# Altium PCB Digital Sensor Module.PcbDoc
Units mil, origin at the board's own origin, x right, y up, seen from the top; angles counter-clockwise.
Board outline 3750 x 900 mil, 2 copper layers (Top Layer, Bottom Layer); 42 components, 43 nets, 164 pads, 222 vias.
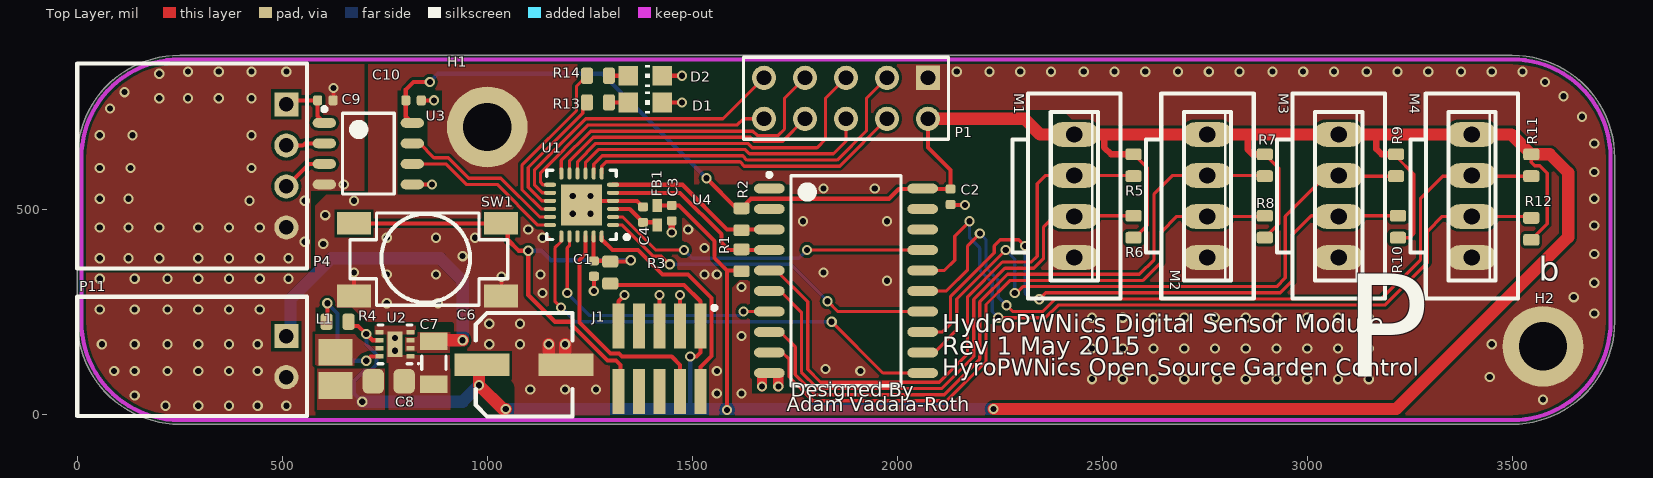
[diagram p0: Top Layer view]
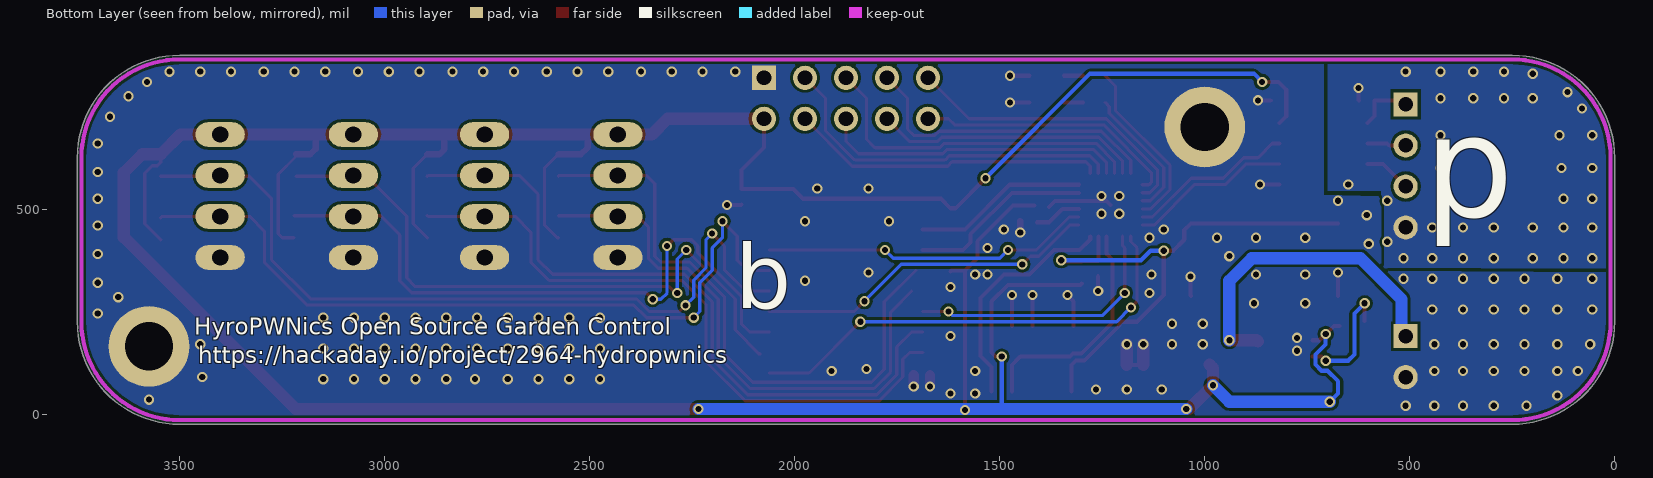
[diagram p1: Bottom Layer view, seen from below]

## Layer stack, top to bottom
Top Solder: solder mask 0.4, Solder Resist, Dk 3.5
Top Layer: signal copper 1.4
Dielectric 1: dielectric 12.6, FR-4, Dk 4.8
Bottom Layer: signal copper 1.4
Bottom Solder: solder mask 0.4, Solder Resist, Dk 3.5

## Board outline
0,225 0,625 cw(c250,625) 250,875 3500,875 cw(c3500,625) 3750,625 3750,225 cw(c3500,225) 3500,-25 250,-25 cw(c250,225)

## Design rules (kind name [scope] priority, off if disabled: settings)
AcuteAngle [All] p1: minimum=6.00000000000000E+0001 checktracksonly=FALSE
Clearance [All] p1: gap=7
ComponentClearance [All] p1: gap=0 collisioncheckmode=3 verticalgap=10 showdistances=FALSE
FanoutControl Fanout_SOIC [(InComponent('U8') AND InComponent('U7'))] p3: bgadir=Out bgaviamode=Centered fanoutstyle=Staggered fanoutdirection=Alternating viagrid=1 // Fanout_SOIC (Default Rule)
FanoutControl Fanout_Small [All] p4: bgadir=Out bgaviamode=Centered fanoutstyle=Auto fanoutdirection=Alternating viagrid=1 // Fanout_Small (Default Rule)
HoleSize [All] p1: absolutevalues=TRUE maxlimit=200 minlimit=15 maxpercent=80.000 minpercent=20.000
MinimumSolderMaskSliver [All] p1 off: minsoldermaskwidth=10
PasteMaskExpansion [All] p1: expansion=-1
PolygonConnect [All] p1: connectstyle=Direct reliefconductorwidth=10 reliefentries=4 polygonreliefangle="90 Angle" airgapwidth=10
RoutingVias [All] p1: holewidth=15 width=25 viastyle="Through Hole" minholewidth=15 minwidth=25 maxholewidth=28 maxwidth=50
SMDToCorner [All] p1: distance=30000
SilkToSilkClearance [All] p1 off: silktosilkclearance=10
SilkToSolderMaskClearance SilkscreenOverComponentPads [IsPad] p1 off: minsilkscreentomaskgap=10 clearancetoexposedcopper=TRUE
SolderMaskExpansion [All] p1: expansion=4
Width [All] p1: maxlimit=200 minlimit=7 preferedwidth=8 minimp=50.000000 maximp=50.000000 favimp=50.000000
22 further rules are at their usual default settings.

## Components (designator, comment, footprint, x,y, rotation, side; value= is the part's Value field where it differs from the comment)
C1 "100nF" C0402 1260,355 r270 top
C2 "100nF" C0402 2130,530 r270 top
C3 "100nF" C0402 1450,490 r270 top
C4 "100nF" C0402 1380,486.38 r90 top
C6 "EEE-1VA101XP" EEE-1VA101XP 1090,120 r180 top
C7 "10uF 50V" C1206 870,125 r270 top
C8 "0603" C0805 760,80 r180 top
C9 "100nF" C0402 605,765 r0 top
C10 "100nF" C0402 820,765 r0 top
D1 "5988140107F" LED2012120 1385,760 r0 top
D2 "5988140107F" LED2012120 1385,825 r0 top
FB1 "BLM15HG601SN1D" BLM18PG121SN1D 1415,485 r270 top
H1 "M3 Hole" Hole-3mm#1 1025,720 r0 top
H2 "M3 Hole" Hole-3mm#2 3570,145 r0 top
J1 "FTSH-105-XX-X-DV" FTSH-105-XX-X-DV 1420,135 r0 top
L1 "VLS252012T-2R2M1R3" VLS252012T-2R2M1R3 630,110 r270 top
M1 "Molex 0705430003" 4POL254 2431.45,531.77 r270 top
M2 "Molex 0705430003" 4POL254 2756.45,531.77 r270 top
M3 "Molex 0705430003" 4POL254 3076.45,531.77 r270 top
M4 "Molex 0705430003" 4POL254 3401.45,531.77 r270 top
P1 "Header 5X2" HDR2X5 2075,820 r180 top
P4 "Molex 0705530003" 0705530003 510,755 r270 top
P11 "Molex 0705530001" 0705530001 510,190 r270 top
R1 "4.7K" R0603 1620,375 r90 top
R2 "4.7K" R0603 1620,475 r270 top
R3 "1K" R0603 1300,345 r270 top
R4 "100K" R0603 635,225 r0 top
R5 "4.7K" R0603 2576.45,606.77 r270 top
R6 "4.7K" R0603 2576.45,456.77 r90 top
R7 "4.7K" R0603 2896.45,606.77 r270 top
R8 "4.7K" R0603 2896.45,456.77 r90 top
R9 "4.7K" R0603 3216.45,606.77 r270 top
R10 "4.7K" R0603 3221.45,456.77 r90 top
R11 "4.7K" R0603 3546.45,606.77 r270 top
R12 "4.7K" R0603 3546.45,451.77 r90 top
R13 "1K" R0603 1270,760 r0 top
R14 "1K" R0603 1270,825 r0 top
SW1 "TL3301AF160QG" TL3301AF160QG 675,465 r0 top
U1 "MKL05Z16VFK4 - VQFN24" 98ASA00474D 1230,510 r180 top
U2 "TPS62162DSG" DSG8-1600X900TP 775,170 r180 top
U3 "ADUM3210BRZ-RL7" ADUM3210BRZ-RL7 710,635 r0 top
U4 "PCA9518APW" PCA9518APW,512 1875,325 r0 top

## Footprints (in the part's own frame and the unit in brackets; to place one, negate y for a bottom-side part, rotate by r counter-clockwise, add the part's x,y. Pads: shape width x height; smd on the part's side, far side on the other; paste and mask are expansions set on the pad)
4POL254 [mil]
  oval 60x120 hole 40: 1(-150,0) 2(-50,0) 3(50,0) 4(150,0)
  silkscreen extent -250,-150 250,113, body extent -250,-150 250,113, height 454
98ASA00474D [mm] "QFN, 24-Leads, Body 3.98x3.98mm, Pitch 0.50mm, Thermal Pad 2.80x2.80mm, IPC Medium Density"
  oval 0.75x0.25 smd: 1(-1.95,1.25) 2(-1.95,0.75) 3(-1.95,0.25) 4(-1.95,-0.25) 5(-1.95,-0.75) 6(-1.95,-1.25) 13(1.95,-1.25) 14(1.95,-0.75) 15(1.95,-0.25) 16(1.95,0.25) 17(1.95,0.75) 18(1.95,1.25)
  oval 0.25x0.75 smd: 7(-1.25,-1.95) 8(-0.75,-1.95) 9(-0.25,-1.95) 10(0.25,-1.95) 11(0.75,-1.95) 12(1.25,-1.95) 19(1.25,1.95) 20(0.75,1.95) 21(0.25,1.95) 22(-0.25,1.95) 23(-0.75,1.95) 24(-1.25,1.95)
  rect 2.54x2.54 smd: 25(0,0)
  silkscreen extent -2.93,-2.15 2.15,2.15, body extent -2,-2 2,2, height 1
0705530001 [mm]
  rect 1.5x1.5 hole 0.9: 1(0,0)
  round 1.5 hole 0.9: 2(2.54,0)
  silkscreen extent -2.44,-12.95 4.95,1.27, body extent -2.41,-12.88 4.95,0.71, height 6.96
0705530003 [mm] "Molex 2.54mm 0705530003"
  rect 1.5x1.5 hole 0.9: 1(0,0)
  round 1.5 hole 0.9: 2(2.54,0) 3(5.08,0) 4(7.62,0)
  silkscreen extent -2.54,-12.95 10.16,1.27, body extent -2.54,-13.08 10.16,0.51, height 3.02
ADUM3210BRZ-RL7 [mm] "SOIC, 8-Leads, Body 4.90x3.90mm, Pitch 1.27mm, IPC Medium Density"
  oval 1.45x0.6 smd: 1(-2.725,1.905) 2(-2.725,0.635) 3(-2.725,-0.635) 4(-2.725,-1.905) 5(2.725,-1.905) 6(2.725,-0.635) 7(2.725,0.635) 8(2.725,1.905)
  silkscreen extent -2.85,-2.5 1.6,2.88, body extent -2,-2.5 2,2.5, height 1.75
BLM18PG121SN1D [mm] "Chip Inductor, 2-Leads, Body 1.0x0.5mm, IPC Medium Density"
  rect 0.8x0.6 smd: 1(-0.6,0) 2(0.6,0)
  body extent -0.52,-0.28 0.53,0.27, height 0.6
C0402 [mil]
  rrect40% 22x24 smd: 1(-18.7,0) 2(19,0)
  body extent -20,-10 20,10, height 20
C0805 [mil]
  rrect50% 52x60 smd: 1(-37.4,0) 2(38,0)
  body extent -40,-30 40,30, height 35
C1206 [mm]
  rect 1.1x1.7 smd: 1(-1.325,0) 2(1.325,0)
  silkscreen extent -0.4,-0.75 0.4,0.75, body extent -1.68,-0.87 1.67,0.88, height 1.6
DSG8-1600X900TP [mm] "SON, 8-Leads, Body 2x2mm, Pitch 0.5mm, Thermal Pad 1.6x0.9mm, TI Recommended"
  rect 0.5x0.28 smd paste-0.14 mask+0.07: 1(-0.95,0.75) 2(-0.95,0.25) 3(-0.95,-0.25) 4(-0.95,-0.75) 5(0.95,-0.75) 6(0.95,-0.25) 7(0.95,0.25) 8(0.95,0.75)
  rect 0.9x1.6 smd paste-0.45 mask+0.07: 9(0,0)
  silkscreen extent -1.5,-1.2 1.05,1.25, body extent -1.05,-1.05 1.05,1.05, height 0.8
EEE-1VA101XP [mm] "Panasonic VS D EEE-1VA101XP"
  rect 3.4x1.4 smd: 1(2.6,0) 2(-2.6,0)
  silkscreen extent -3,-3.2 3,3.2, body extent -3.5,-3.3 3.5,3.3, height 5.4
FTSH-105-XX-X-DV [mm] "1.27mm pitch, 10 pin, terminal strip; vertical, SMT"
  rect 0.75x2.8 smd mask+0: 1(2.54,2.03) 2(2.54,-2.03) 3(1.27,2.03) 4(1.27,-2.03) 5(0,2.03) 6(0,-2.03) 7(-1.27,2.03) 8(-1.27,-2.03) 9(-2.54,2.03) 10(-2.54,-2.03)
  silkscreen extent 3.28,3.03 3.52,3.27
HDR2X5 [mm] "Connector; Header; 5x2 Position"
  rect 1.5x1.5 hole 0.9: 1(0,0)
  round 1.5 hole 0.9: 2(0,2.54) 3(2.54,0) 4(2.54,2.54) 5(5.08,0) 6(5.08,2.54) 7(7.62,0) 8(7.62,2.54) 9(10.16,0) 10(10.16,2.54)
  silkscreen extent -1.27,-1.27 11.43,3.81
Hole-3mm#1 [mm]
  round 5 hole 3: 1(-0.635,-0.508)
Hole-3mm#2 [mm]
  round 5 hole 3: 1(0.127,0.508)
LED2012120 [mil]
  rect 48x48 smd: A(-41.34,0) C(42,0)
  silkscreen extent 0,-27 12,27, body extent -50,-25 50,25, height 28
PCA9518APW,512 [mm] "SOIC, 20-Leads, Body 12.80x7.50mm, Pitch 1.27mm, IPC Medium Density"
  oval 1.9x0.6 smd: 1(-4.75,5.715) 2(-4.75,4.445) 3(-4.75,3.175) 4(-4.75,1.905) 5(-4.75,0.635) 6(-4.75,-0.635) 7(-4.75,-1.905) 8(-4.75,-3.175) 9(-4.75,-4.445) 10(-4.75,-5.715) 11(4.75,-5.715) 12(4.75,-4.445) 13(4.75,-3.175) 14(4.75,-1.905) 15(4.75,-0.635) 16(4.75,0.635) 17(4.75,1.905) 18(4.75,3.175) 19(4.75,4.445) 20(4.75,5.715)
  silkscreen extent -4.87,-6.5 3.4,6.69, body extent -3.8,-6.5 3.8,6.5, height 2.65
R0603 [mm]
  rrect40% 0.74x1 smd: 1(-0.68,0) 2(0.68,0)
  body extent -0.8,-0.4 0.8,0.4, height 0.8
TL3301AF160QG [mm] "TL3301AF160QG Tactile Switch"
  rect 2.1x1.4 smd: 1(0,0) 1(9.1,0) 2(0,-4.5) 2(9.1,-4.5)
  silkscreen extent -0.25,-5.08 9.53,0.64, body extent -0.43,-5.26 9.57,0.74, height 5.11
VLS252012T-2R2M1R3 [mm] "Precision Wire Wound Inductor, 2-Leads, Body 2.5x2.0mm, IPC Medium Density"
  rect 1.65x2.1 smd: 1(-1.025,0) 2(1.025,0)
  body extent -1.3,-1.05 1.3,1.05, height 1.2

## Part data
C1 C2 C3 C4 C9 C10: library part GRM155R71C104KA88D, "CAP CER 0402 100nF 16V 10% X7R"
C6: "CAP ALUM 100UF 35V 20% SMD"
C7: library part CL31A106KBHNNNE, "CAP CER 10UF 50V 10% X5R 1206"
C8: library part CL21A226KQQNNNE, "CAP CER 22UF 6.3V 10% X5R 0805"
D1 D2: "LED 0805 Yellow"
H1 H2: library part Hole, "3mm Hole"
J1: library part "ARM Cortex JTAG-DEBUG Header"
M1 M2 M3 M4: library part "Molex 0705430003 Alt", "Molex 4 Pin Clip Connector"
P1: "Header, 5-Pin, Dual row"
P4: library part 0705530003, "Molex 0705530003 Right Angle 2.54mm Shrouded Header"
P11: library part 0705530001, "Molex 0705530002 Right Angle 2.54mm Shrouded Header"
R1 R2 R5 R6 R7 R8 R9 R10 R11 R12: library part ERJ3EKF4701V, "RES 0603 4.7K 100mW 1%"
R3 R13 R14: library part ERJ-3EKF1001V, "RES 0603 1K 100mW 1%"
R4: library part RC0603FR-07100KL, "RES 100K OHM 1/10W 1% 0603 SMD"
U1: library part "MKL05Z16VFK4 - 24 Pin VQFN", "ARM Cortex M0+"
U2: library part TPS62162SOP
U3: "DGTL ISO 2.5KV GEN PURP 8SOIC"
U4: library part PCA9518APW512, "IC I2C HUB 5CH EXPANDBL 20-TSSOP"

## Via types
v1: diameter 25, hole 15, Top Layer to Bottom Layer, tented both sides, 222 vias

## Nets (pads, with @x,y where several pads share a name; then routed paths per layer and width w, separated by ;. In a path a pad name is that pad's centre, name@x,y a point inside that pad or via, vN(x,y) a via of type N, cw(c..) or ccw(c..) an arc to the next point about the centre after c; other vN are vias at no path point)
3.3VCC: C2.1 C3.1 C6.1 C8.2 C10.1 FB1.1 J1.1 L1.2 M1.1 M2.1 M3.1 M4.1 P1.2 R1.1 R2.1 R3.2 R4.2 R5.1 R6.1 R7.1 R8.1 R9.1 R10.1 R11.1 R12.1 U2.6 U3.8 U4.20 | length 9463.7
  Top Layer w8: R6.1 2578.73,430.01 2610.49,461.77 2610.49,599.51 R5.1 ; R8.1 2930.49,464.05 2930.49,599.51 R7.1 ; R9.1 3216.46,628.04 3260,584.5 3260,440 3250.01,430.01 R10.1 ; R12.1 3585.49,464.05 3585.49,587.36 3567.28,605.57 3554.43,605.57 3546.46,613.54 R11.1
  Top Layer w10: R4.2@671.78,215 685,215 v1(705,195) 720.16,179.84 U2.6 ; U3.8 801.3,725.98 C10.1 801.3,791.3 820,810 v1(860,810) ; R3.2 1303.23,315 1480,315 1520,275 J1.1 1520,150 1510,140 v1(1495,140) ; FB1.1 C3.1@1449.92,508.62 ; C3.1 1467.26,508.7 1554.5,421.46 1554.5,380.5 1585,350 ; v1(1535,575) 1608.23,501.77 R2.1 1643.23,525 1980,525 2003.7,548.7 C2.1 2130,595 2075,650 P1.2 ; v1(1585,10) 1585,350 ; R1.1 1618.23,350 1585,350
  Top Layer w15: 2505,675 2505,650 2521.46,633.54 R5.1 ; 2848.23,681.77 2855,675 2855,645 2866.46,633.54 R7.1 ; 3168.23,681.77 3168.23,646.77 3181.46,633.54 R9.1
  Top Layer w30: C6.1 980,112.36 v1(980,70) 1038,12 v1(1045,12) ; P1.2 2310,720 2348.23,681.77 M1.1 M2.1 M3.1 3168.23,681.77 M4.1 3498.23,681.77 R11.1 3591.46,633.54 3636.46,588.54 3636.46,431.46 3217,12 v1(2235,12)
  Bottom Layer w10: v1(695,30) 675,50 675,80 700.5,105.5 715.15,105.5 730,120.35 730,145 705,170 v1(705,195) ; v1@857.5,807.5 v1(860,810) 880,830 1280,830 v1(1535,575) ; 1495,12 v1(1495,140)
  Bottom Layer w30: v1(695,30) 940,30 v1(980,70) ; v1(1045,12) 1495,12 v1(2235,12)
12VCC: C7.1 P11.1 U2.2 U2.3 | length 790.4
  Top Layer w30: C7.1 872.83,180 v1(940,180)
  Bottom Layer w30: P11.1@520,190 520,280 620,380 885,380 940,325 v1(940,180)
EN1: U1.20 U4.7 | length 660.4
  Top Layer w8: v1(1195,295) 1195,405 1200.47,410.47 U1.20 ; v1(1625,250) U4.7
  Bottom Layer w8: v1(1195,295) 1250,240 1615,240 v1(1625,250)
EN2: U1.19 U4.11 | length 1134.3
  Top Layer w8: v1(1180,260) 1165,275 1165,405 1180.79,420.79 U1.19 ; v1(1840,225) 1965,100 U4.11
  Bottom Layer w8: v1(1180,260) 1215,225 v1(1840,225)
EN3: U1.1 U4.14 | length 842.5
  Top Layer w8: U1.1 1329.21,460.79 1405,385 1425,385 v1(1445,365) ; v1(1830,275) 1855,250 U4.14
  Bottom Layer w8: v1(1445,365) 1740,365 v1(1830,275)
EN4: U1.2 U4.17 | length 805.1
  Top Layer w8: U1.2 1330.74,480.47 1411.21,400 v1(1480,400) ; v1(1780,400) U4.17
  Bottom Layer w8: v1(1480,400) 1500,380 1760,380 v1(1780,400)
GND: C1.2 C2.2 C3.2 C4.2 C6.2 C7.2 C8.1 C10.2 D1.C D2.C H1.1 H2.1 J1.3 J1.5 J1.9 M1.4 M2.4 M3.4 M4.4 P1.1 P11.2 SW1.2 U1.4 U1.25 U2.1 U2.4 U2.5 U2.9 U3.5 U4.10 | length 969
  Top Layer w10: SW1.2@675,287.83 v1(675,345) ; U3.5 v1(865,560) ; C10.2 v1(870,765) ; SW1.2@1033.27,287.83 1035,289.57 v1(1035,335) ; C6.2@1150,120 C6.2 ; U1.25 1239.84,519.84 U1.4 1365.54,519.84 C4.2 ; v1(1260,300) C1.2 ; J1.9 1320,275 v1(1335,290) ; J1.5 v1(1420,290) ; D1.C v1(1475,760) ; D2.C v1(1475,825) ; J1.3 v1(1470,290) ; C2.2 2131,510 v1(2165,510)
  Top Layer w15: v1(1450,443.01) C3.2
  Top Layer w25: v1(1670,67.01) U4.10@1670,95 ; v1(1710,67.01) U4.10@1710,95
  Top Layer w30: C6.2@1150,120 v1(1150,170) ; C6.2@1190,120 v1(1190,170)
  other v1: 215,20 295,20 370,20 440,20 510,20 3575,35 140,45 1560,50 1620,50 1105,60 1190,60 1265,60 2475,85 2550,85 2625,85 2700,85 2780,85 2850,85 2925,85 3000,85 3075,85 3150,85 3445,90 90,105 140,105 220,105 295,105 370,105 440,105 1560,105 1910,105 1825,110 775,154.25 2475,160 2550,160 2625,160 2700,160 2775,160 2850,160 2925,160 3000,160 3075,160 3150,160 60,170 140,170 220,170 295,170 370,170 440,170 1005,170 1080,170 3450,170 775,185.75 1620,190 1005,220 1080,220 2475,235 2550,235 2625,235 2700,235 2775,235 2850,235 2925,235 3000,235 3075,235 3150,235 3700,245 55,255 140,255 220,255 295,255 370,255 445,255 755,270 880,270 3650,285 1135,295 1620,310 3700,320 1975,325 55,330 140,330 220,330 295,330 370,330 445,330 515,330 755,340 875,340 1130,340 1530,340 1560,340 1820,345 940,385 3700,390 1530,405 600,415 755,430 875,430 970,430 1135,430 1100,450 1490,450 3700,460 1770,470 1975,470 605,485 1208.35,488.35 1251.65,488.35 675,520 3700,525 1208.35,531.65 1251.65,531.65 1820,550 1945,550 3700,590 3700,660 3670,725 3625,775 3580,810 2145,835 2225,835 2300,835 2375,835 2455,835 2530,835 2605,835 2685,835 2760,835 2835,835 2915,835 2990,835 3065,835 3145,835 3220,835 3295,835 3375,835 3450,835 3525,835
I2C_SCL: R1.2 U1.5 U4.4 | length 450.7
  Top Layer w10: U1.5 1470.47,539.53 1571.5,438.5 1571.5,418.5 1590,400 U4.4
I2C_SDA: R2.2 U1.6 U4.3 | length 426.5
  Top Layer w10: U1.6 1475.79,559.21 1585,450 U4.3
I3.3VCC: C9.1 P4.1 U3.1 | length 142.2
  Top Layer w10: P4.1 520,765 C9.1 586.3,726.42 U3.1
IGND: C9.2 P4.4 U3.4 | length 30.4
  Top Layer w10: C9.2 625,766 v1(625,795)
  other v1: 55,380 125,380 200,380 295,380 370,380 445,380 515,380 555,420 55,455 125,455 200,455 295,455 370,455 445,455 420,520 555,520 55,525 125,525 650,560 55,600 130,600 425,600 55,680 135,680 425,680 80,745 200,770 270,770 345,770 425,770 115,785 200,830 270,835 345,835 425,835 510,835
IUART0_RX: P4.3 U3.3 | length 115.5
  Top Layer w10: P4.3 565,610 U3.3
IUART0_TX: P4.2 U3.2 | length 94.8
  Top Layer w10: P4.2 550,655 555,660 U3.2
NetC4_1: C4.1 FB1.2 U1.3 | length 115.4
  Top Layer w10: U1.3 1347.52,500.16 C4.1 FB1.2@1408.7,467.68
NetD1_A: D1.A R13.2 | length 46.9
  Top Layer w10: R13.2 D1.A
NetD2_A: D2.A R14.2 | length 46.9
  Top Layer w10: R14.2 D2.A
NetL1_1: L1.1 U2.7
NetM1_2: M1.2 R5.2 U4.5 | length 1475.8
  Top Layer w8: U4.5@1705,350 1781.39,273.61 1781.39,108.61 1812.81,77.19 2102.19,77.19 2171.46,146.46 2171.46,285.71 2256.52,370.77 2327.23,370.77 2341.45,385 2341.45,561.45 2361.77,581.77 M1.2 2574.68,581.77 R5.2
NetM1_3: M1.3 R6.2 U4.6 | length 1346.4
  Top Layer w8: U4.6@1715,300 1766.39,248.61 1766.39,102.39 1806.6,62.19 2108.4,62.19 2186.46,140.24 2186.46,279.5 2262.73,355.77 2333.44,355.77 2356.45,378.78 2356.45,455 2383.23,481.77 M1.3 2433.23,483.55 R6.2
NetM2_2: M2.2 R7.2 U4.8 | length 1708.7
  Top Layer w8: U4.8 1715,200 1751.39,163.61 1751.39,96.18 1800.38,47.19 2114.62,47.19 2201.46,134.03 2201.46,273.28 2268.95,340.77 2590.45,340.77 2626.45,376.77 2626.45,536.77 2671.45,581.77 M2.2 2894.68,581.77 R7.2
NetM2_3: M2.3 R8.2 U4.9 | length 1595
  Top Layer w8: U4.9 1720,150 1736.39,133.61 1736.39,90.55 1736.1,90.26 1794.17,32.19 2120.83,32.19 2216.46,127.82 2216.46,267.07 2275.16,325.77 2599.49,325.77 2643.45,369.73 2643.45,443.77 2681.45,481.77 M2.3 2894.68,481.77 R8.2
NetM3_2: M3.2 R9.2 U4.12 | length 1582.8
  Top Layer w8: U4.12@2085,146.92 2085,145 2145,205 2145,280.47 v1(2264.53,400) ; v1(2286.46,295) 2290.72,295 2306.49,310.77 2925.45,310.77 2946.45,331.77 2946.45,481.77 3046.45,581.77 M3.2 3078.23,580 R9.2
  Bottom Layer w8: v1(2264.53,400) 2286.46,378.08 v1(2286.46,295)
NetM3_3: M3.3 R10.2 U4.13 | length 1579
  Top Layer w8: U4.13 2110,200 2130,220 2130,286.68 2236.46,393.14 2236.46,410 2251.46,425 2296.46,425 v1(2311.46,410) ; v1(2346.46,280) 2362.23,295.77 2934.49,295.77 2963.45,324.73 2963.45,436.77 3010.23,483.55 R10.2
  Bottom Layer w8: v1(2311.46,410) 2311.46,295 2326.46,280 v1(2346.46,280)
NetM4_2: M4.2 R11.2 U4.15 | length 1944.2
  Top Layer w8: U4.15 2120,300 2171.46,351.46 2171.46,410 v1(2201.46,440) ; v1(2266.46,265) 2281.46,250 2355.24,250 2386.02,280.77 3180.45,280.77 3276.45,376.77 3276.45,526.45 3330,580 R11.2
  Bottom Layer w8: v1(2201.46,440) 2216.46,425 2216.46,356.28 2246.46,326.28 2246.46,285 v1(2266.46,265)
NetM4_3: M4.3 R12.2 U4.16 | length 1910.8
  Top Layer w8: U4.16 2115,350 2140,375 2140,433.54 v1(2176.46,470) ; v1(2246.46,235) 2361.46,235 2392.23,265.77 3189.49,265.77 3293.45,369.73 3293.45,446.18 3329.04,481.77 M4.3 3543.23,481.77 R12.2
  Bottom Layer w8: v1(2176.46,470) 2176.46,430 2201.46,405 2201.46,350.07 2231.46,320.07 2231.46,250 v1(2246.46,235)
NetR4_1: R4.1 U2.8 | length 291.7
  Top Layer w10: R4.1@610,226.77 v1(610,270) ; v1(705,130) 715.47,140.47 U2.8
  Bottom Layer w10: v1(610,270) 635,245 635,145 650,130 v1(705,130)
PTB1: P1.10 U1.13 | length 648.8
  Top Layer w8: U1.13 1135.79,559.21 1130,565 1130,588.79 1246.21,705 1610,705 1625,720 P1.10
PTB2: P1.9 U1.14 | length 735.6
  Top Layer w8: U1.14 1134.26,539.53 1115,558.79 1115,595 1240,720 1575,720 P1.9
PTB10: P1.6 U1.9 | length 747.1
  Top Layer w8: U1.9 1239.84,613.78 1271.07,645 1629.05,645 1639.57,634.47 1844.47,634.47 1875,665 P1.6
PTB11: P1.5 U1.10 | length 835.5
  Top Layer w8: U1.10 1220.16,615.3 1264.85,660 1635.26,660 1645.79,649.47 1804.47,649.47 1825,670 1825,770 P1.5
RESET: C1.1 J1.10 R3.1 SW1.1 U1.23 | length 1343.8
  Top Layer w10: SW1.1@675,465 1033.27,465 1049.95,448.32 1049.95,425.05 1076.73,398.27 v1(1100,398.27) 1100,290 1165,225 1208,225 1208,216.03 1293.22,130.8 1314.2,130.8 1325,120 J1.10@1325,55.08 ; C1.1@1259.53,381.29 U1.23 ; C1.1 1298.07,373.7 R3.1 1346.77,371.77 v1(1350,375)
  Bottom Layer w10: v1(1100,398.27) 1131.73,398.27 1155,375 v1(1350,375)
RX_LED: R14.1 U1.16 | length 431.6
  Top Layer w8: U1.16 1131.2,500.16 1085,546.36 1085,607.43 1217.66,740.09 1217.66,799.44 R14.1
SPI0_MISO: P1.3 U1.8 | length 880.3
  Top Layer w8: U1.8 1259.53,609.53 1280,630 1622.83,630 1633.36,619.47 1853.26,619.47 1925,691.21 1925,770 P1.3
SPI0_MOSI: P1.8 U1.11 | length 656
  Top Layer w8: U1.11 1200.47,616.83 1258.64,675 1641.47,675 1652,664.47 1719.47,664.47 P1.8
SPI0_SCK: P1.7 U1.12 | length 762
  Top Layer w8: U1.12 1180.79,618.36 1252.43,690 1647.69,690 1658.21,679.47 1709.47,679.47 1725,695 1725,770 P1.7
SPI0_SS: P1.4 U1.7 | length 769.9
  Top Layer w8: U1.7 1279.21,604.21 1290,615 1616.62,615 1627.15,604.47 1859.47,604.47 P1.4
TCK/SWDCLK: J1.4 U1.22 | length 568.9
  Top Layer w10: U1.22 1239.84,390.94 1225,376.09 1225,223.07 1300.27,147.8 1321.24,147.8 1329.04,140 1450,140 1470,120 J1.4
TDI: J1.8
TDO/SWO: J1.6
TMS/SWDIO: J1.2 U1.24 | length 573.3
  Top Layer w10: U1.24 1279.21,425.79 1305,400 1367.37,400 1427.37,340 1490,340 1546.76,283.24 1546.76,141.76 1520,115 J1.2
TX_LED: R13.1 U1.15 | length 333.5
  Top Layer w8: U1.15 1132.73,519.84 1100,552.57 1100,601.21 1232.66,733.88 1232.66,749.44 R13.1
UART0_RX: U1.18 U3.6 | length 397.8
  Top Layer w8: U3.6 898.79,610 948.79,560 1024.14,560 1123.35,460.79 U1.18
UART0_TX: U1.17 U3.7 | length 410.3
  Top Layer w8: U3.7@835,660 870,625 905,625 955,575 1033.18,575 1127.71,480.47 U1.17
  Top Layer w10: U3.7 U3.7@835,660
pads on no net: J1.7 U1.21 U4.1 U4.2 U4.18 U4.19

## Polygon pours and split planes (outlines as drawn)
GND on Top Layer "Bottom Layer-No Net" (solid, remove dead copper, pour order 26): 1088.18,520 1097.46,529.29 1097.46,534.75 1097.46,617.46 1217.66,737.66 1220,740 1220,865 710,865 710,500 780,500 780,790 880,790 890,790 890,740 855,740 855,665 855,645 852.5,642.5 885,610 898.79,610 925,583.79 948.79,560 1015,560 1024.14,560 1065,519.14 1065.86,520
GND on Top Layer "Top Layer-No Net" (solid, remove dead copper, pour order 34): 1505,865 1505,560 2180,560 2185,555 2185,485 2105,485 2110,480 2110,15 2110,-15 3750,-15 3750,875 1505,875
IGND on Top Layer "Bottom Layer-No Net" (solid, remove dead copper, pour order 36): 10,860 10,355 570,355 570,545 700,545 700,640 700,860
GND on Top Layer "Bottom Layer-No Net" (solid, remove dead copper, pour order 13): 1610,65 1610,-15 2195,-15 2190,-10 2190,35 2095,35 2092.19,32.19 1794.17,32.19 1777.81,32.19 1760,50 1630,50 1630,65
NetL1_1 on Top Layer "Bottom Layer-No Net" (solid, remove dead copper, pour order 10): 747,165 717.07,165 711.53,167.29 684.93,185.07 680,190 680,195 580,195 580,115 675,115 675,130 691.46,146.46 712.07,155 747,155
GND on Top Layer "Bottom Layer-No Net" (solid, remove dead copper, pour order 4): 910,10 910,143 792,143 792,195 825,195 825,215 725,215 725,194 755,194 755,185 755,125 760,125 760,10
12VCC on Top Layer "Bottom Layer-No Net" (solid, remove dead copper, pour order 2): 910,150 800,150 800,190 825,190 830,190 830,200 910,200
3.3VCC on Top Layer "Bottom Layer-No Net" (solid, remove dead copper, pour order 6): 750,110 750,10 585,10 585,110
GND on Top Layer "Bottom Layer-No Net" (solid, remove dead copper, pour order 22): 1740,587.24 1740,72.24 2010,72.24 2010,587.24
GND on Top Layer "Bottom Layer-No Net" (solid, remove dead copper, pour order 24): 0,345 315,345 580,345 580,535 1049.14,535 1154.57,429.57 1150,425 1150,240 1165,225 1190,225 1198.82,225 1325,98.82 1320,93.82 1320,-15 925,-15 920,-10 920,145 920,220 915,225 810,225 705,225 670,260 580,260 580,-15 0,-15
GND on Top Layer "Bottom Layer-No Net" (solid, remove dead copper, pour order 30): 1475,500.96 1475,420 1440,420 1425,435 1415,435 1383.79,435 1380,431.21 1407.37,403.84 1407.37,360 1427.37,340 1490,340 1540,290 1546.76,283.24 1546.76,141.76 1520,115 1520,-15 1645,-15 1645,55 1645,85 1640,90 1640,120 1640,280 1640,330 1610,330 1605,325 1585,345 1585,390.96
IGND on Bottom Layer "Bottom Layer-No Net" (solid, remove dead copper, pour order 38): 10,860 10,355 570,355 570,545 700,545 700,640 700,860
GND on Bottom Layer "Top Layer-No Net" (solid, remove dead copper, pour order 32): 3750,-25 3750,875 710,875 710,535 568.9,531.37 568.9,350 0,345 0,-25

## Keep-outs
Keep-Out Layer:
  lines w10: 10,225 ccw(c250,225) 250,-15 3310,-15 3500,-15 ccw(c3500,225) 3740,225 3740,625 ccw(c3500,625) 3500,865 665,865 285,865 250,865 ccw(c250,625) 10,625 10,225

## Silkscreen, mask and mechanical layers (free items; w line width, h text height)
Top Overlay:
  text "b" at 3565,305 h100
  text "HydroPWNics Digital Sensor Module" at 2110,185 h75
  text "Rev 1 May 2015" at 2110,130 h75
  text "HyroPWNics Open Source Garden Control" at 2110,80 h70
  text "Designed By" at 1740,30 h60
  text "P" at 3090,10 h430
  text "Adam Vadala-Roth" at 1730,-5 h60
Bottom Overlay:
  text "p" at 465,400 h430
  text "b" at 2145,205 h270
  text "HyroPWNics Open Source Garden Control" at 3465,180 h70
  text "https://hackaday.io/project/2964-hydropwnics" at 3455,110 h70
Mechanical 15:
  the board outline again, w10